# Altium PCB ContadorAsincronico_PCB.PcbDoc
Units mm, origin at the board's own origin, x right, y up, seen from the top; angles counter-clockwise.
Board outline 44.27 x 40.79 mm, 2 copper layers (Top Layer, Bottom Layer); 16 components, 10 nets, 56 pads, 11 vias.
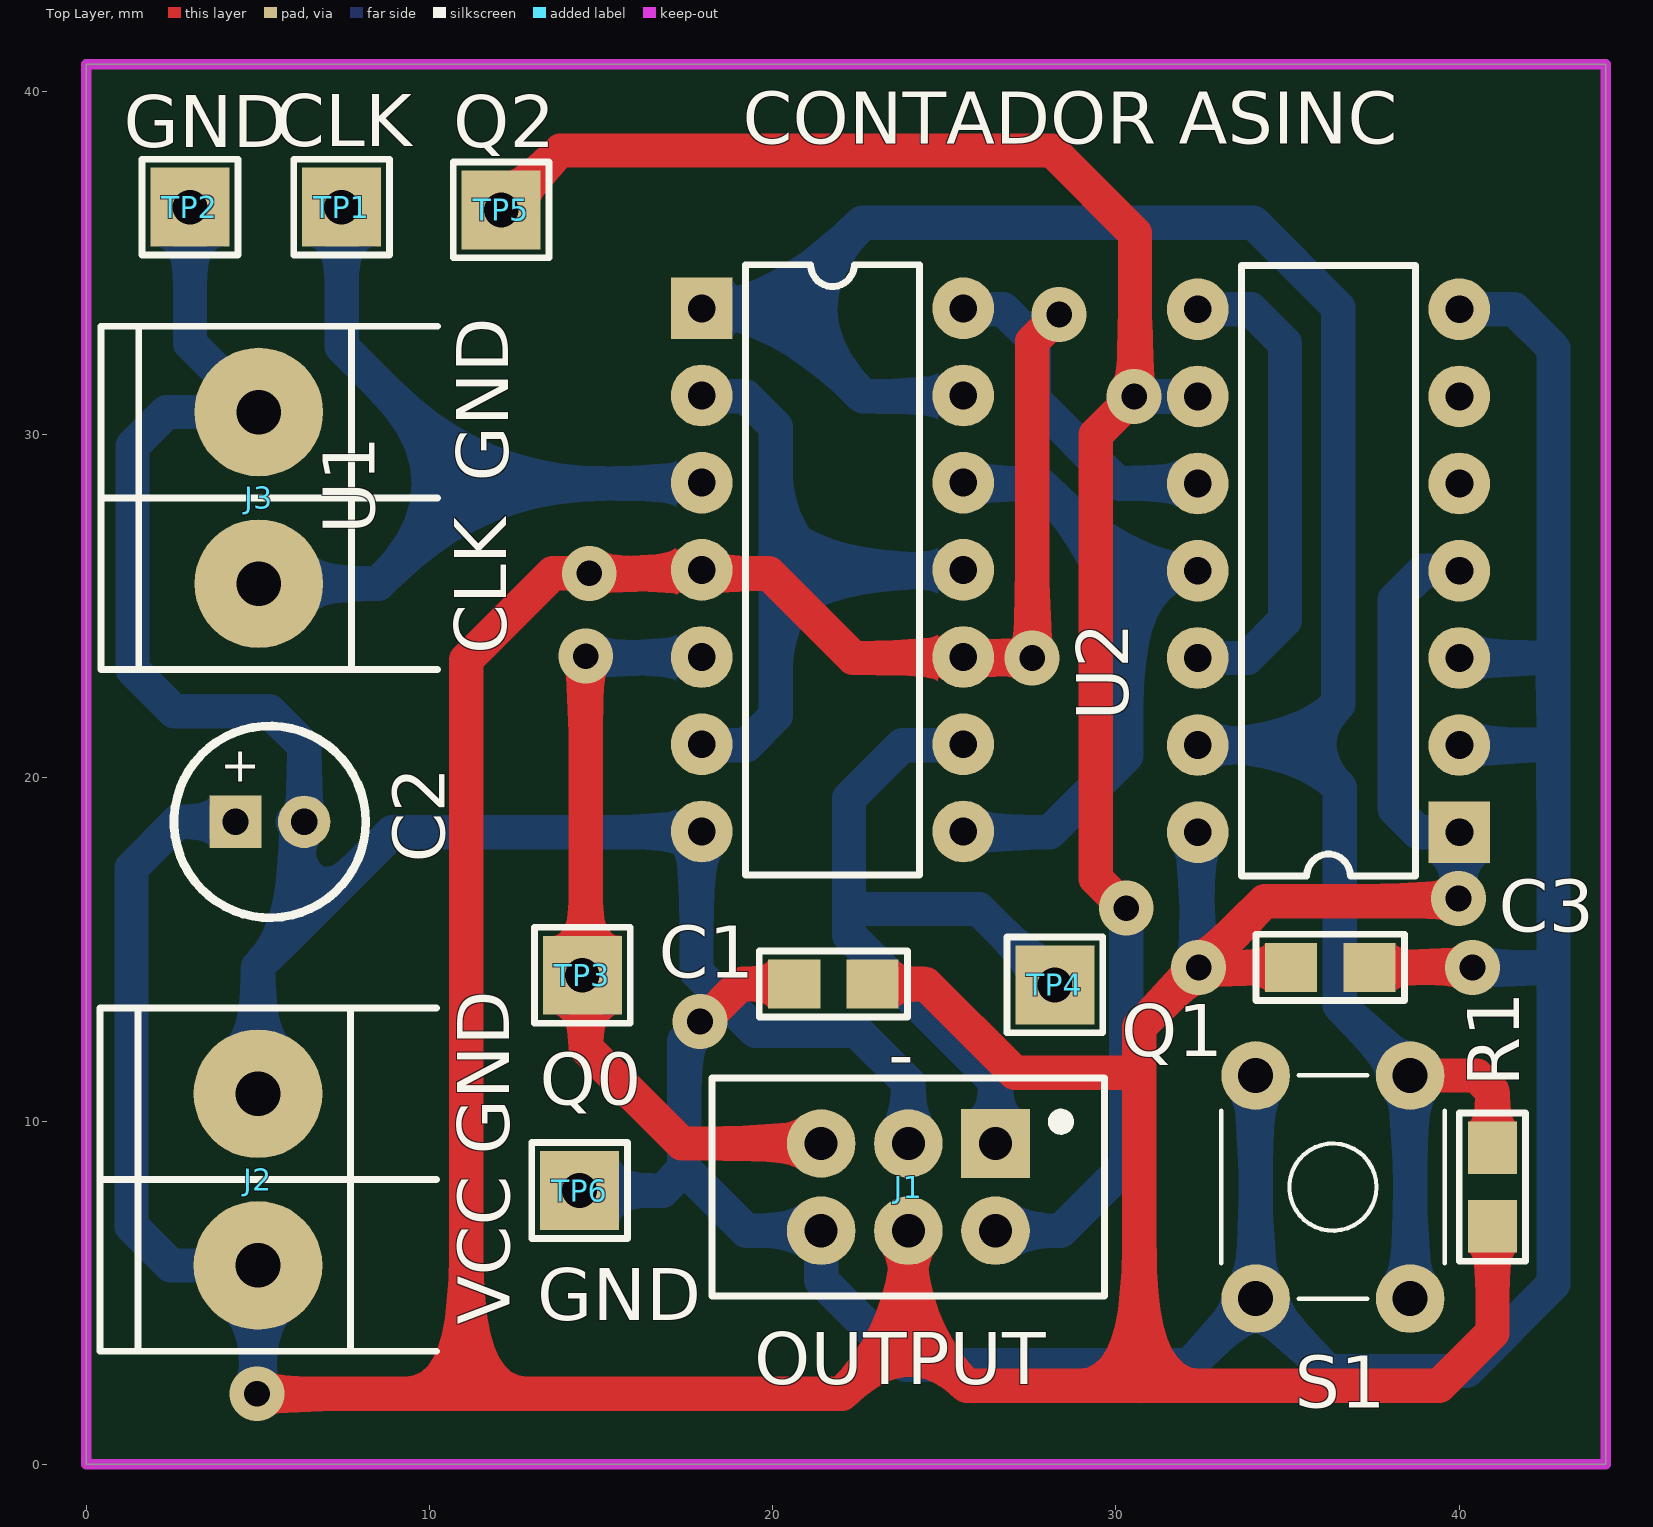
[diagram p0: Top Layer view]
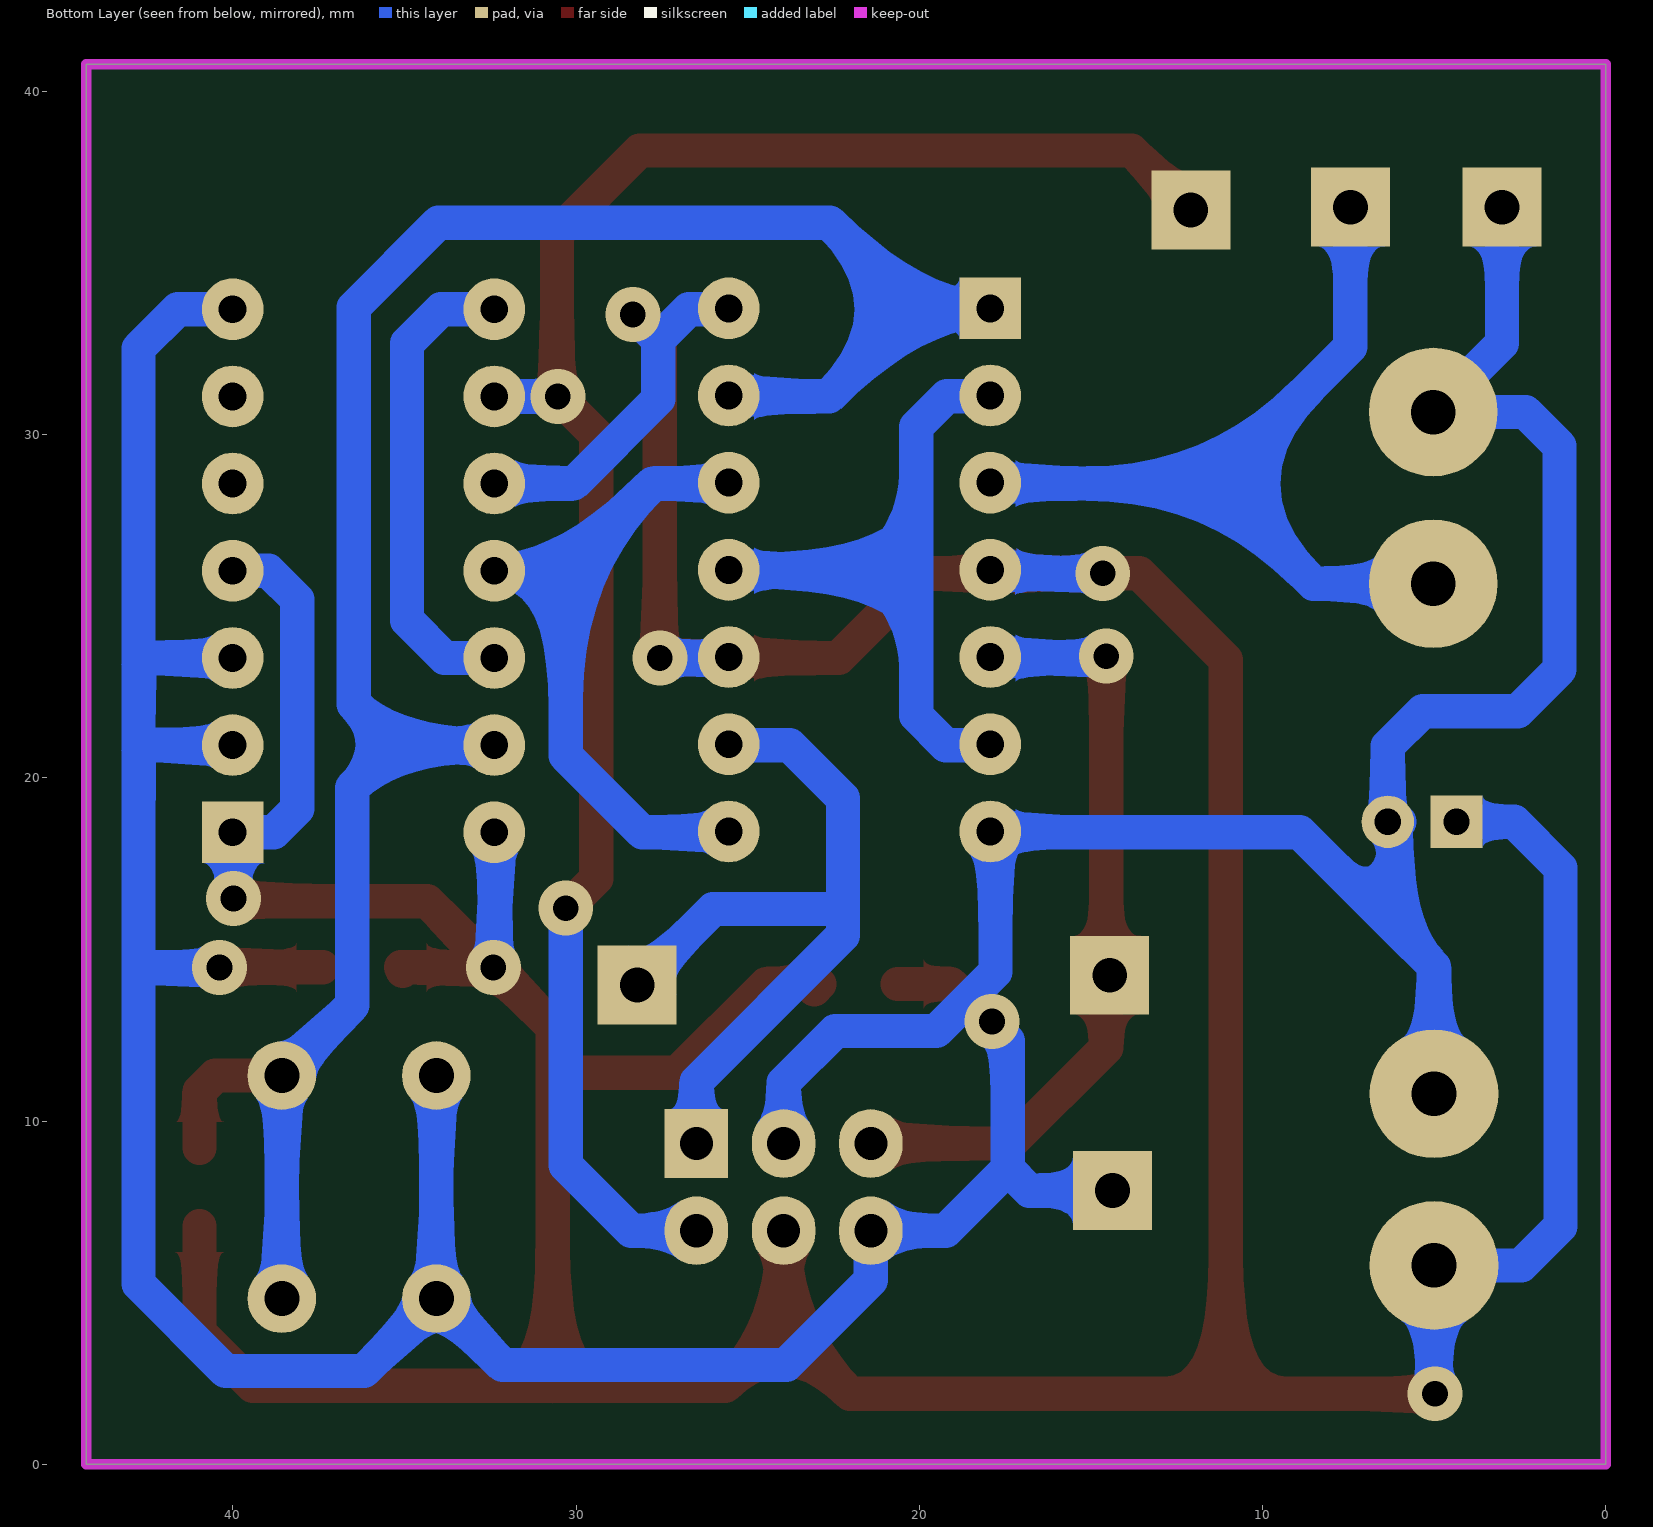
[diagram p1: Bottom Layer view, seen from below]
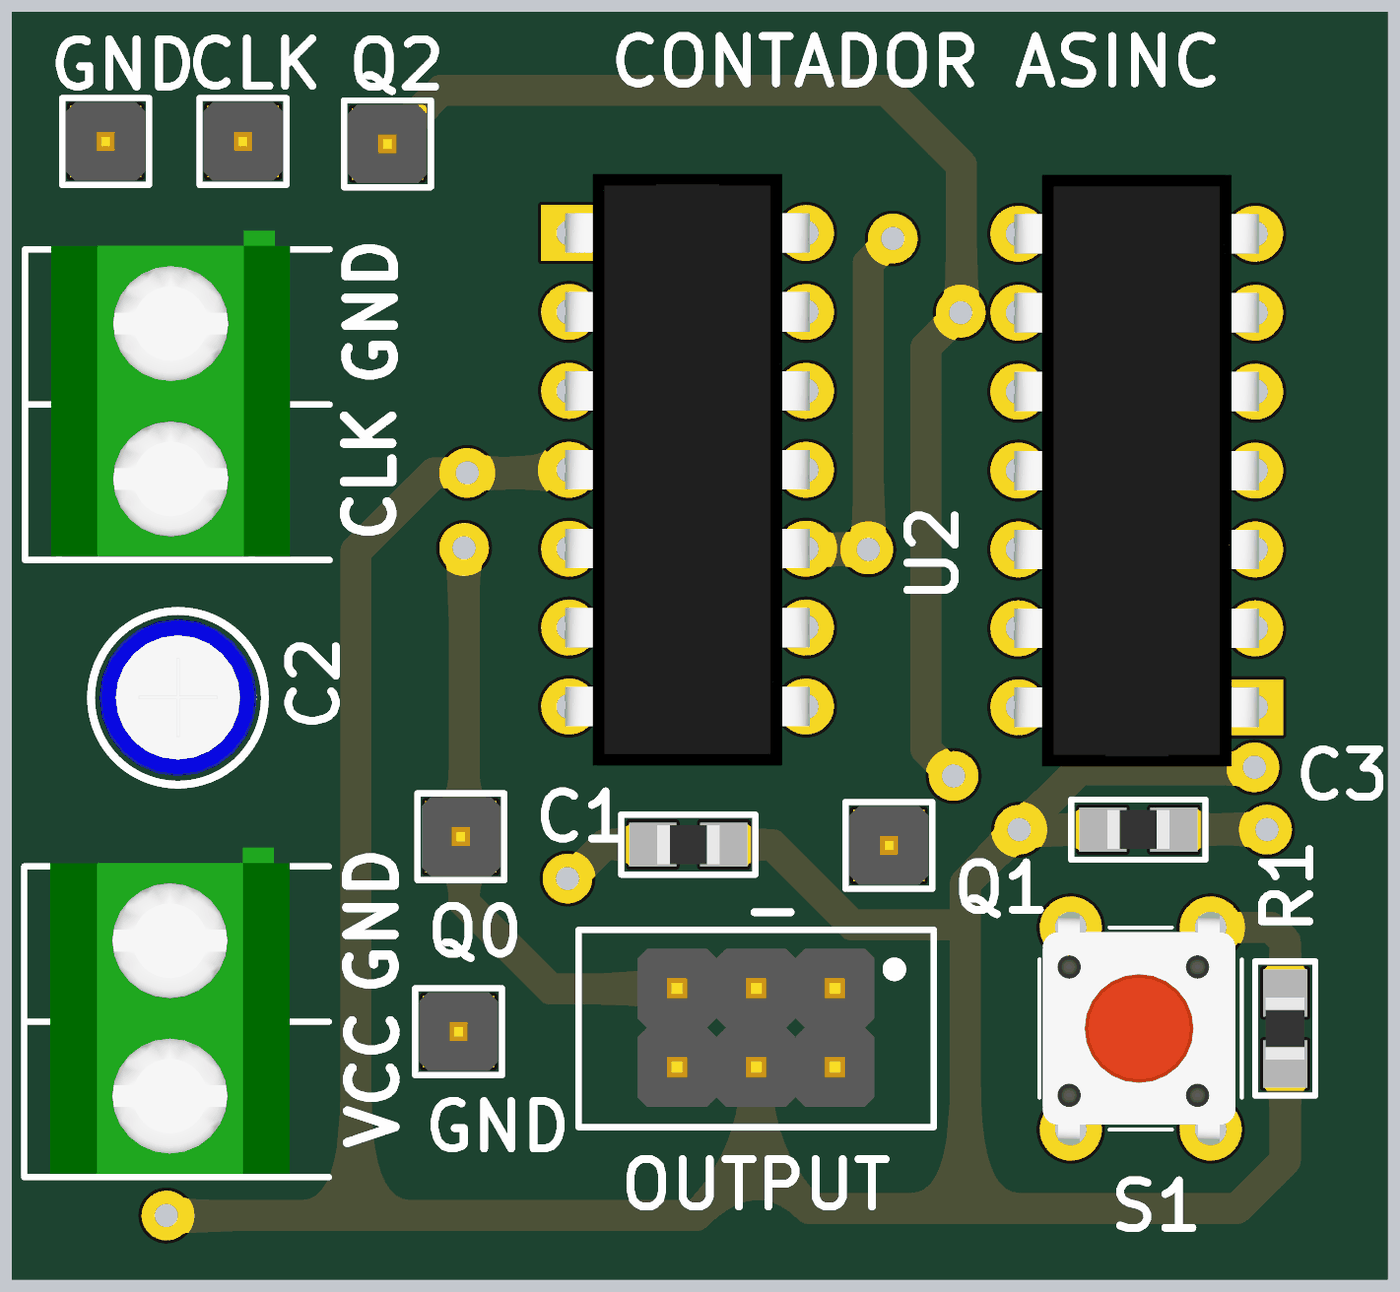
[diagram p2: 3D render of the assembled board from above, using the file's embedded part models]

## Layer stack, top to bottom
Top Solder: solder mask 0.0102, Solder Resist, Dk 3.5
Top Layer: signal copper 0.0356
Dielectric 1: dielectric 0.32, FR-4, Dk 4.8
Bottom Layer: signal copper 0.0356
Bottom Solder: solder mask 0.0102, Solder Resist, Dk 3.5

## Board outline
0,0 44.272,0 44.272,40.792 0,40.792

## Design rules (kind name [scope] priority, off if disabled: settings)
Clearance [All] p1: gap=0.4
HoleSize [All] p1: absolutevalues=TRUE maxlimit=2.54 minlimit=0.75 maxpercent=80.000 minpercent=20.000
PolygonConnect [All] p1: connectstyle=Relief reliefconductorwidth=0.254 reliefentries=4 polygonreliefangle="90 Angle" airgapwidth=0.254
RoutingVias [All] p1: holewidth=0.75 width=1.6 viastyle="Through Hole" minholewidth=0.75 minwidth=1.6 maxholewidth=0.75 maxwidth=1.6
SolderMaskExpansion [All] p1: expansion=0.102
Width PowerWidth [InNetClass('Power')] p1: maxlimit=2 minlimit=0.8 preferedwidth=1
Width [All] p2: maxlimit=1 minlimit=0.6 preferedwidth=0.8
29 further rules are at their usual default settings.

## Components (designator, comment, footprint, x,y, rotation, side; value= is the part's Value field where it differs from the comment)
C1 "100nF" 0805 21.768,13.995 r180 top
C2 "10uF" CAP100RP 5.35,18.72 r0 top
C3 "100nF" 0805 36.246,14.478 r0 top
J1 "OUTPUT" SIP3*2 26.492,9.347 r180 top
J2 "SUPPLY" BORNERA2 5.004,8.295 r0 top
J3 "CLOCK" BORNERA2 5.029,28.158 r0 top
R1 "100k" 0805 40.97,8.077 r90 top
S1 "RESET" TACTSWITCH 36.322,8.077 r180 top
TP1 "CLK" TPTH 7.442,36.627 r0 top
TP2 "GND" TPTH 3.023,36.627 r0 top
TP3 "Q0" TPTH 14.453,14.249 r0 top
TP4 "Q1" TPTH 28.219,13.97 r0 top
TP5 "Q2" TPTH 12.09,36.551 r0 top
TP6 "GND" TPTH 14.376,7.976 r0 top
U1 "SN74LS74AN" DIP14 17.932,33.68 r0 top
U2 "SN74LS74AN" DIP14 40.005,18.415 r180 top

## Footprints (in the part's own frame and the unit in brackets; to place one, negate y for a bottom-side part, rotate by r counter-clockwise, add the part's x,y. Pads: shape width x height; smd on the part's side, far side on the other; paste and mask are expansions set on the pad)
0805 [mil] "Pasivo 0805"
  rect 60x56 smd: 1(-45,0) 2(45,0)
  silkscreen extent -85,-38 85,38, body extent -40,-25 39,25, height 15
BORNERA2 [mm] "Bornera con Tornillos 5mm separación"
  round 3.75 hole 1.3: 1(0,2.5) 2(0,-2.5)
  silkscreen extent -4.6,-5 5.2,5, body extent -3.76,-4.89 3.94,5.61, height 10
CAP100RP [mil] "Body diameter 5mm"
  rect 60x60 hole 30: 1(-39.37,0)
  round 60 hole 30: 2(39.37,0)
  silkscreen extent -110,-110 110,110, body extent -99,-99 99,100, height 454
DIP14 [mm]
  rect 1.8x1.8 hole 0.813: 1(0,0)
  round 1.8 hole 0.813: 2(0,-2.54) 3(0,-5.08) 4(0,-7.62) 5(0,-10.16) 6(0,-12.7) 7(0,-15.24) 8(7.62,-15.24) 9(7.62,-12.7) 10(7.62,-10.16) 11(7.62,-7.62) 12(7.62,-5.08) 13(7.62,-2.54) 14(7.62,0)
  silkscreen extent 1.27,-16.51 6.35,1.27, body extent -0.13,-17.14 7.75,1.9, height 4.19
SIP3*2 [mm]
  rect 2x2 / inner rect 1.524x1.524 / far side rect 1.85x2 hole 0.965: 1(0,0)
  round 2 / inner round 1.524 / far side oval 1.85x2 hole 0.965: 2(0,2.54) 3(2.54,0) 4(2.54,2.54) 5(5.08,0) 6(5.08,2.54)
  silkscreen extent -3.18,-1.91 8.25,4.45, body extent -1.26,-1.3 6.36,3.78, height 10.1
TACTSWITCH [mm]
  round 2 hole 1.016: 1(-2.25,-3.25) 2(-2.25,3.25) 3(2.25,-3.25) 4(2.25,3.25)
  silkscreen extent -3.25,-3.25 3.25,3.25, body extent -3.05,-3.95 3.15,3.95, height 7
TPTH [mm]
  rect 2.3x2.3 hole 1.016: 1(0,0)
  silkscreen extent -1.4,-1.4 1.4,1.4, body extent -1.27,-1.27 1.27,1.27, height 6.04

## Part data
C1 C3: library part CAP
C2: library part CAPPOL
J1: library part CON3*2
J2 J3: library part "BORNERA 2"
R1: library part RES
S1: library part "TACT SWITCH"
TP1 TP2 TP3 TP4 TP5 TP6: library part TP
U1 U2: "Dual D-Type Positive-Edge-Triggered Flip-Flop with Preset and Clear"

## Via types
v1: diameter 1.6, hole 0.75, Top Layer to Bottom Layer, 11 vias

## Nets (pads, with @x,y where several pads share a name; then routed paths per layer and width w, separated by ;. In a path a pad name is that pad's centre, name@x,y a point inside that pad or via, vN(x,y) a via of type N, cw(c..) or ccw(c..) an arc to the next point about the centre after c; other vN are vias at no path point)
CLK: J3.2 TP1.1 U1.3 | length 23.7
  Bottom Layer w1: J3.2 8.513,25.658 11.43,28.575 ; TP1.1 7.442,32.563 11.43,28.575 ; U1.3@17.78,28.575 11.43,28.575
GND: C1.2 C2.2 C3.2 J1.3 J1.6 J2.1 J3.1 S1.3 S1.4 TP2.1 TP6.1 U1.7 U2.2 U2.3 U2.7 | length 152
  Top Layer w1: v1(17.882,12.903) 17.983,12.903 19.075,13.995 C1.2 ; C3.2 v1(40.386,14.478)
  Bottom Layer w1: TP2.1 3.023,32.664 J3.1 2.337,30.658 1.346,29.667 1.346,23.165 2.565,21.946 5.334,21.946 6.35,20.93 C2.2 ; J2.1 5.004,14.503 6.121,15.621 ; C2.2@6.012,18.72 C2.2 ; TP6.1 16.789,7.976 17.424,8.611 ; v1@17.704,12.725 v1(17.882,12.903) ; J1.3 23.952,11.125 22.454,12.624 19.507,12.624 18.605,13.525 ; S1.3 S1.4 ; U2.2@39.98,20.955 U2.2 42.596,20.955 42.748,20.803 ; U2.3@39.98,23.495 U2.3 42.57,23.495 42.748,23.317 ; U2.7@39.98,33.655 U2.7 41.605,33.655 42.748,32.512 42.748,23.317 ; v1(40.386,14.478) 42.672,14.478 42.748,14.402 ; 6.121,15.621 8.915,18.415 17.78,18.415 17.78,14.351 18.605,13.525 ; 6.121,15.621 6.121,18.491 C2.2 ; 17.424,8.611 17.424,12.344 18.605,13.525 ; 17.424,8.611 19.228,6.807 J1.6 21.412,5.359 23.876,2.896 32.14,2.896 S1.4 ; S1.4 36.181,2.718 40.208,2.718 42.748,5.258 42.748,14.402 ; 42.748,14.402 42.748,20.803 ; 42.748,20.803 42.748,23.317
NetU1_2: U1.2 U1.6 U1.11 | length 22.9
  Bottom Layer w1: U1.6@17.78,20.955 19.228,20.955 20.091,21.819 20.091,24.714 ; U1.2@17.78,31.115 19.202,31.115 20.091,30.226 20.091,27.356 ; U1.11@25.4,26.035 21.412,26.035 ; 20.091,24.714 20.091,25.832 ; 20.091,24.714 21.412,26.035 ; 20.091,25.832 20.091,27.356 ; 20.091,25.832 20.295,26.035 21.412,26.035 ; 20.091,27.356 21.412,26.035
NetU1_8: U1.8 U1.12 U2.11 | length 19.2
  Bottom Layer w1: U1.8@25.4,18.415 28.067,18.415 30.302,20.65 30.302,26.035 ; U1.12@25.4,28.575 27.762,28.575 30.302,26.035 ; U2.11@32.36,26.035 30.302,26.035
NetU2_8: U2.8 U2.12 | length 14.1
  Bottom Layer w1: U2.12@32.36,23.495 U2.12 33.833,23.495 34.925,24.587 34.925,32.664 33.934,33.655 U2.8 U2.8@32.36,33.655
Q0: J1.5 TP3.1 U1.5 | length 22.7
  Top Layer w1: v1(14.554,23.546) 14.554,12.141 17.348,9.347 J1.5
  Bottom Layer w1: v1(14.554,23.546) 14.605,23.495 U1.5@17.78,23.495
Q1: J1.1 TP4.1 U1.9 | length 22.6
  Bottom Layer w1: U1.9@25.4,20.955 23.774,20.955 22.225,19.406 22.225,16.18 ; J1.1 26.492,11.151 22.225,15.418 22.225,16.18 ; TP4.1 26.01,16.18 22.225,16.18
Q2: J1.2 TP5.1 U2.9 | length 54.6
  Top Layer w1: TP5.1 13.818,38.278 28.143,38.278 30.554,35.867 30.554,31.139 v1(30.531,31.115) 29.413,29.997 29.413,17.069 30.277,16.205 v1(30.302,16.205)
  Bottom Layer w1: J1.2 28.397,6.807 30.302,8.712 v1(30.302,16.205) ; v1(30.531,31.115) U2.9@32.36,31.115
RESET: R1.2 S1.1 S1.2 U1.1 U1.13 U2.13 | length 65
  Top Layer w1: S1.1 40.514,11.327 40.97,10.871 R1.2
  Bottom Layer w1: U1.1@17.78,33.655 20.091,33.655 ; U1.13@25.4,31.115 22.631,31.115 20.091,33.655 ; U2.13@32.36,20.955 U2.13 35.281,20.955 ; S1.2 S1.1 36.525,13.374 36.525,19.71 35.281,20.955 ; 20.091,33.655 22.606,36.17 34.011,36.17 36.474,33.706 36.474,22.149 35.281,20.955
VCC: C1.1 C2.1 C3.1 J1.4 J2.2 R1.1 U1.4 U1.10 U1.14 U2.1 U2.4 U2.10 U2.14 | length 182.2
  Top Layer w1: v1(4.978,2.057) 11.074,2.057 ; C1.1@23.063,13.843 C1.1 24.46,13.995 27.051,11.405 30.683,11.405 30.683,12.751 v1(32.41,14.478) ; J1.4 23.952,3.988 ; v1(28.346,33.503) 27.559,32.715 v1(27.559,23.495) 22.352,23.495 19.888,25.959 v1(14.656,25.959) 13.589,25.959 11.074,23.444 11.074,2.057 ; 30.683,11.252 30.683,2.286 ; v1@32.41,14.402 v1(32.41,14.478) ; C3.1@35.052,14.376 C3.1@34.95,14.478 ; C3.1 C3.1@34.95,14.478 ; v1(39.98,16.485) 39.98,16.408 34.341,16.408 v1(32.41,14.478) ; R1.1 40.97,3.835 39.421,2.286 30.683,2.286 ; 11.074,2.057 22.022,2.057 23.952,3.988 ; 23.952,3.988 25.654,2.286 30.683,2.286 ; v1(32.41,14.478) C3.1@34.95,14.478
  Bottom Layer w1: C2.1 2.667,18.72 1.321,17.374 1.321,6.934 2.46,5.795 J2.2 5.004,2.032 v1(4.978,2.057) ; v1(14.656,25.959) 17.704,25.959 U1.4@17.78,26.035 ; U1.10@25.4,23.495 v1(27.559,23.495) ; U1.14@25.4,33.655 26.721,33.655 27.61,32.766 ; v1(28.346,33.503) 27.61,32.766 ; U2.14@32.36,18.415 32.36,14.529 v1(32.41,14.478) ; U2.10@32.36,28.575 30.074,28.575 27.61,31.039 27.61,32.766 ; v1(39.98,16.485) 39.98,18.415 38.811,18.415 38.125,19.101 38.125,25.197 38.964,26.035 U2.4@39.98,26.035
pads on no net: U2.5 U2.6

## Keep-outs
Keep-Out Layer:
  the board outline again, w0.3

## Silkscreen, mask and mechanical layers (free items; w line width, h text height)
Top Overlay:
  text "CONTADOR ASINC" at 19.126,38.481 h1.52
  text "GND" at 12.294,28.626 h1.52 r90
  text "CLK" at 12.243,23.597 h1.52 r90
  text "-" at 23.368,11.227 h1.52
  text "GND" at 12.319,9.017 h1.52 r90
  text "VCC" at 12.344,4.064 h1.52 r90

## Text inside footprints (layer, text, board x,y; h text height)
C2: Top Overlay "+" at 3.902,19.888 h1.02